# Altium PCB PCB_DYBoard_Feeder_V2.PcbDoc
Units mm, origin at the board's own origin, x right, y up, seen from the top; angles counter-clockwise.
Board outline 152.4 x 101.6 mm, 4 copper layers (Top Layer, Layer 1, Layer 2, Bottom Layer), stack 0.603 mm thick; 53 components, 31 nets, 160 pads, 54 vias.
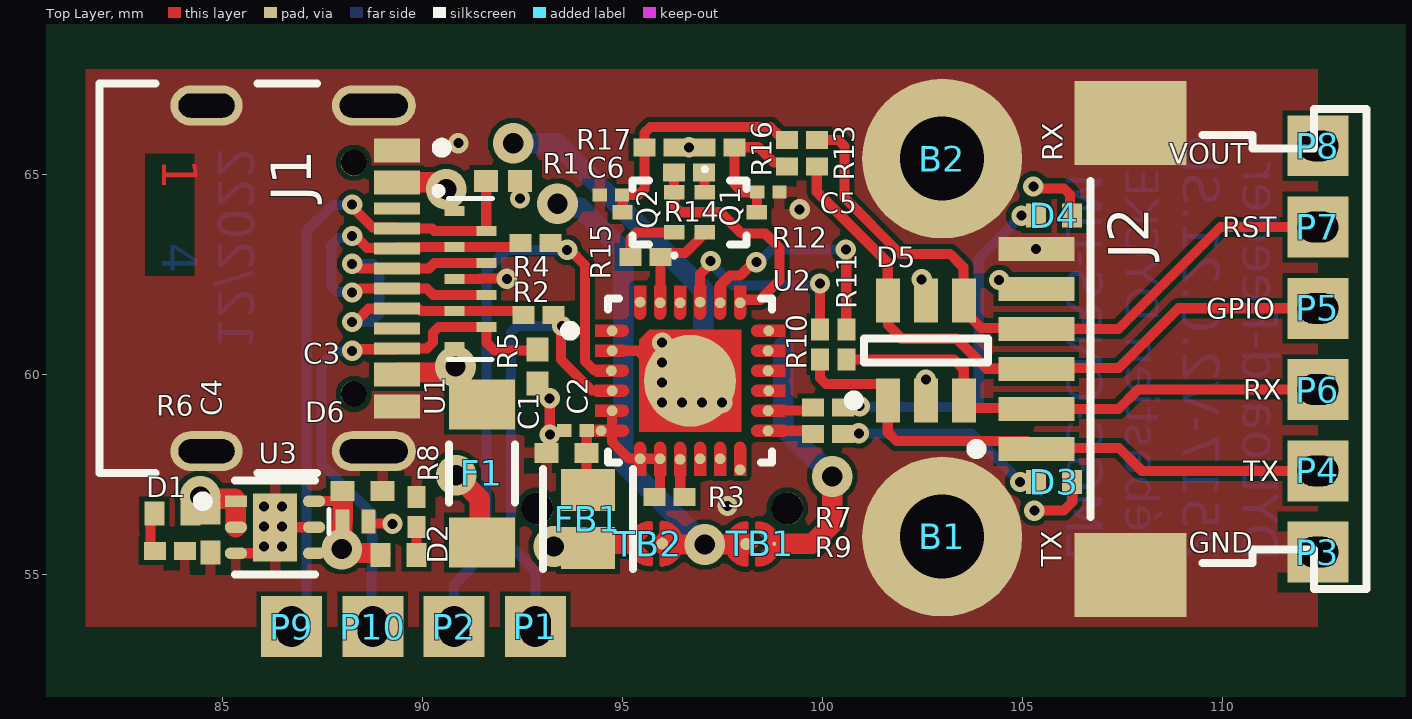
[diagram p0: Top Layer view]
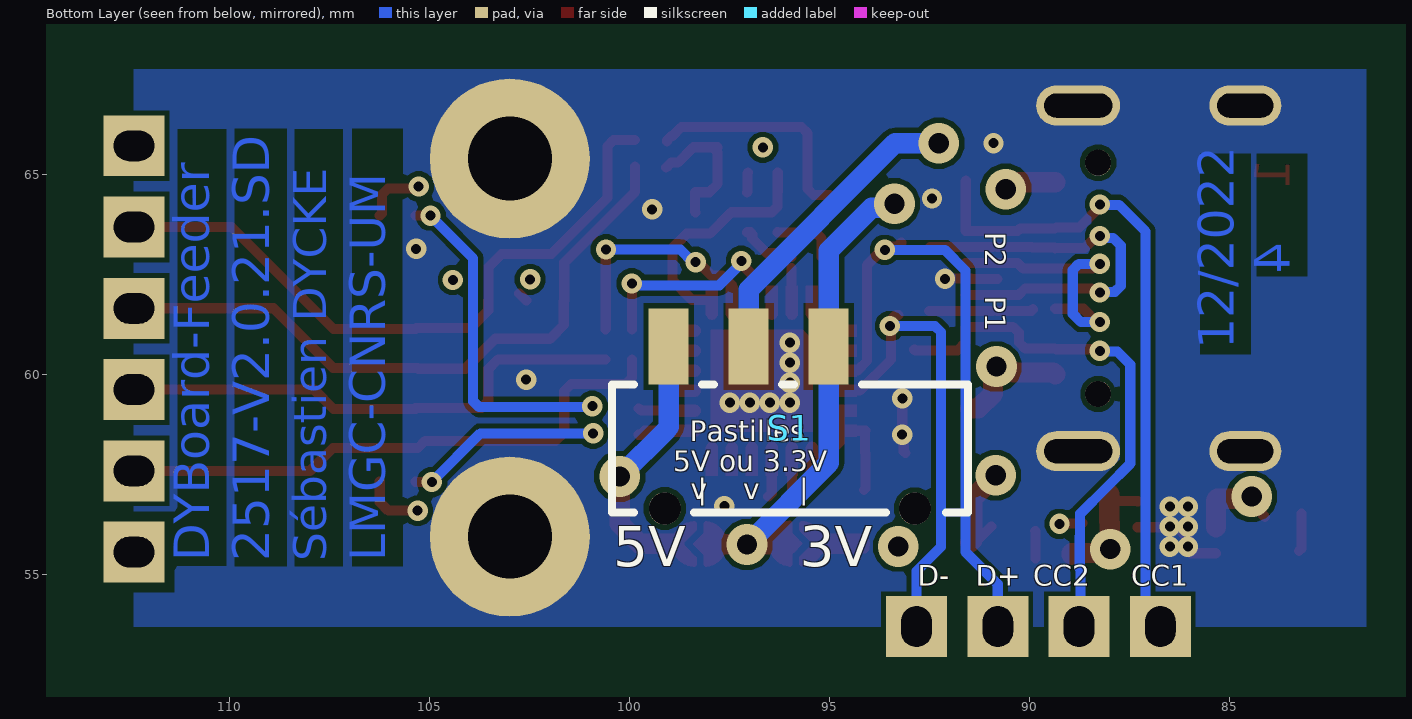
[diagram p1: Bottom Layer view, seen from below]
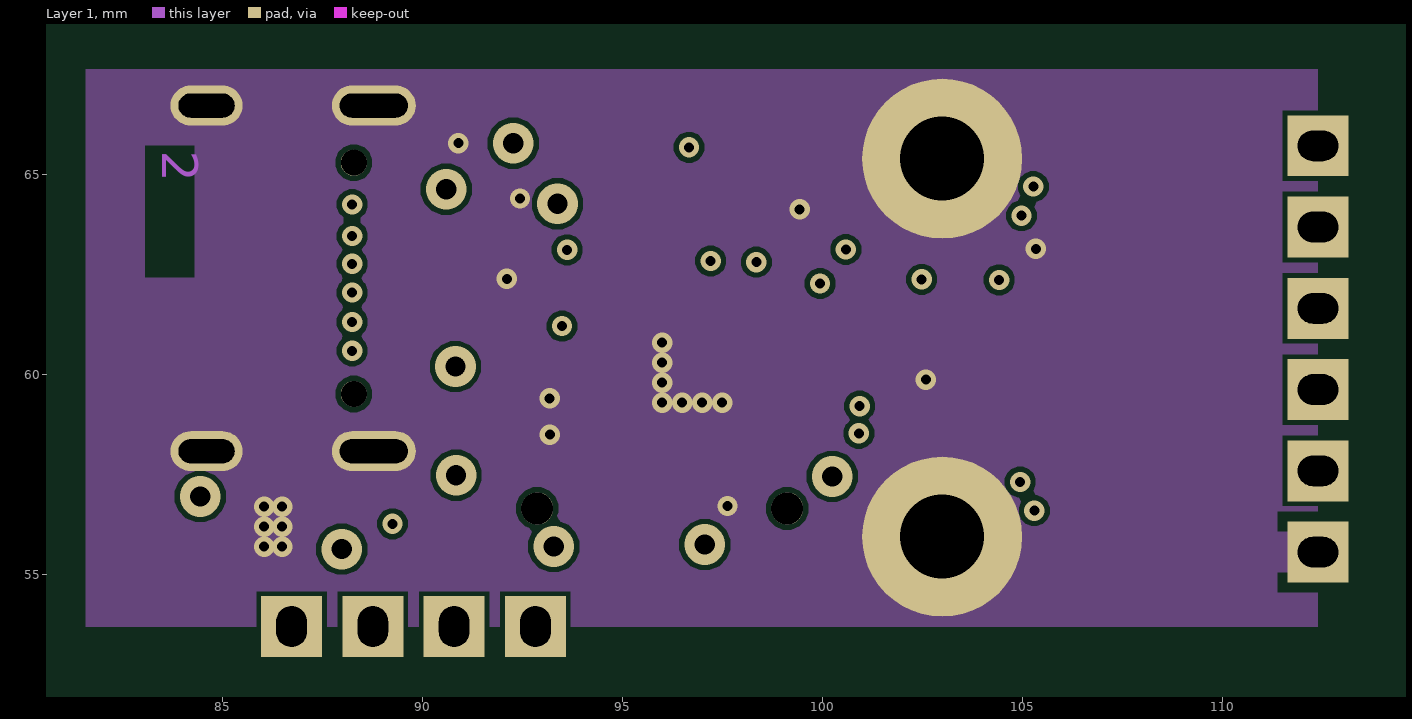
[diagram p2: Layer 1]
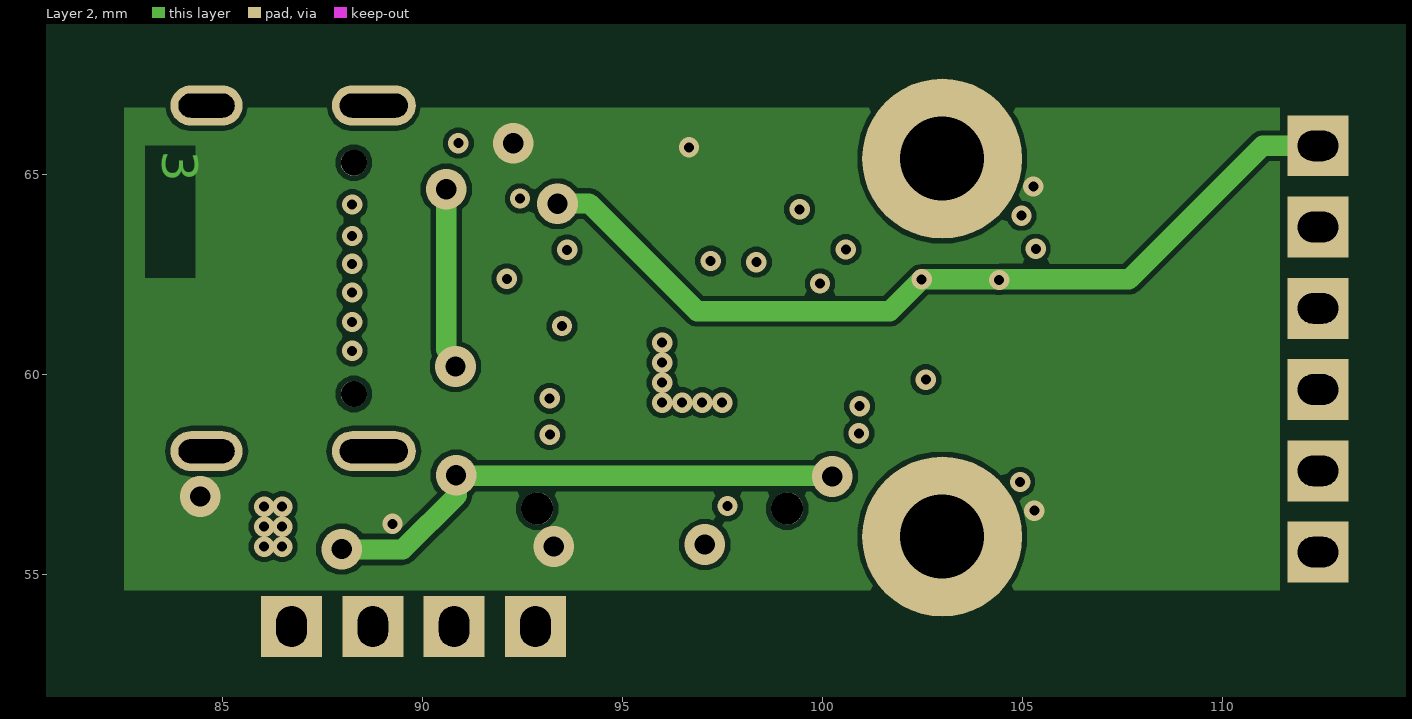
[diagram p3: Layer 2]

## Layer stack, top to bottom
Top Solder: solder mask 0.0102, Solder Resist, Dk 3.5
Top Layer: signal copper 0.0356
Dielectric 2: prepreg 0.0711, FR-4, Dk 4.1
Layer 1: signal copper 0.035
Dielectric 3: prepreg 0.0711, FR-4, Dk 4.1
Layer 2: signal copper 0.035
Dielectric 1: dielectric 0.32, FR-4, Dk 4.8
Bottom Layer: signal copper 0.0356
Bottom Solder: solder mask 0.0102, Solder Resist, Dk 3.5

## Board outline
25.4,25.4 177.8,25.4 177.8,127 25.4,127

## Design rules (kind name [scope] priority, off if disabled: settings)
Clearance [All] p1: gap=0.127 ignorepadtopadclearanceinfootprint=FALSE
ComponentClearance [All] p1: gap=0 collisioncheckmode=3 verticalgap=0 showdistances=FALSE
DiffPairsRouting [All] p1: maxlimit=0.254 minlimit=0.127 mostfreqgap=0.254 toplayer_minwidth=0.127 toplayer_maxwidth=0.254 toplayer_prefwidth=0.254 midlayer1_minwidth=0.127 midlayer1_maxwidth=0.254 midlayer1_prefwidth=0.254 midlayer2_minwidth=0.127 midlayer2_maxwidth=0.254 midlayer2_prefwidth=0.254 bottomlayer_minwidth=0.127 bottomlayer_maxwidth=0.254 bottomlayer_prefwidth=0.254 maxuncoupledlength=12.7
HoleSize [All] p1: absolutevalues=TRUE maxlimit=2.54 minlimit=0.25 maxpercent=80.000 minpercent=20.000
HoleToHoleClearance [All] p1: gap=0.127 allowstackedmicrovias=TRUE
MinimumSolderMaskSliver [All] p1: minsoldermaskwidth=0.127
PolygonConnect PolygonConnect_4 [HasFootprint('solderPad_2') And OnLayer('Layer 1')] p1: connectstyle=Direct reliefconductorwidth=0.254 reliefentries=4 polygonreliefangle="90 Angle" airgapwidth=0.254
PolygonConnect PolygonConnect_3 [HasFootprint('FP-USB4105-GF-A-MFG')] p2: connectstyle=Direct reliefconductorwidth=0.254 reliefentries=4 polygonreliefangle="90 Angle" airgapwidth=0.254
PolygonConnect PolygonConnect_2 [HasFootprint('SEB_MOLeX_6p')] p3: connectstyle=Direct reliefconductorwidth=0.254 reliefentries=4 polygonreliefangle="90 Angle" airgapwidth=0.254
PolygonConnect PolygonConnect_1 [HasFootprint('bolt_M2')] p4: connectstyle=Direct reliefconductorwidth=0.254 reliefentries=4 polygonreliefangle="90 Angle" airgapwidth=0.254
PolygonConnect [All] p5: connectstyle=Relief reliefconductorwidth=0.254 reliefentries=4 polygonreliefangle="90 Angle" airgapwidth=0.254
RoutingVias [All] p1: holewidth=0.25 width=0.809 viastyle="Through Hole" minholewidth=0.25 minwidth=0.809 maxholewidth=0.711 maxwidth=1.27
SilkToSilkClearance [All] p1: silktosilkclearance=0.127
SilkToSolderMaskClearance [IsPad] p1: minsilkscreentomaskgap=0.127 clearancetoexposedcopper=TRUE
SolderMaskExpansion [All] p1: expansion=0.102 istentingtop=FALSE
UnRoutedNet [All] p1: checkbadconnections=TRUE
Width [All] p1: maxlimit=1.016 minlimit=0.127 preferedwidth=0.254
22 further rules are at their usual default settings.

## Classes and differential pairs
component class PCB_DYBoard_Feeder_V2: B1 B2 C2 C3 C4 C5 D1 D2 D3 D4 D5 D6 F1 FB1 J1 J2 P1 P2 P3 P4 P5 P6 P7 P8 Q1 Q2 R1 R2 R3 R4 R5 R6 R7 R8 R9 R10 R11 R12 R13 R14 R15 R16 R17 S1 S? TB1 TB2 U1 U2 U3

## Components (designator, comment, footprint, x,y, rotation, side; value= is the part's Value field where it differs from the comment)
B1 "bolt_M2" bolt_M2#1 96.825,41.656 r0 top
B2 "bolt_M2" bolt_M2#2 103.759,70.561 r0 top
C1 "Cap Semi" 0402 93.608,58.043 r0 top value="100pF 0402"
C2 "0.1µF 0201" CAPC0603X33X15LL03T05 93.831,58.6 r0 top
C3 "Cap Semi" 0402 88.513,57.096 r180 top value="100pF 0402"
C4 "Cap Semi" 0402 84.709,56.056 r90 top value="100pF 0402"
C5 "0201 10nF" CAPC0603X33X15LL03T05 98.654,64.567 r180 top
C6 "0201 10nF" CAPC0603X33X15LL03T05 94.717,64.491 r0 top
D1 "LED_0402" LED_0402 84.205,56.526 r180 top
D2 "LED_0402" LED_0402 88.958,55.497 r0 top
D3 "LED_0402" LED_0402 106.25,57.321 r180 top
D4 "LED_0402" LED_0402 106.25,63.978 r180 top
D5 "SRV05-4.TCT" SMTC-SOT23-6_V 102.591,60.604 r90 top locked
D6 "ESDA17P20-1F2" ESDA17P20-1F2 88.015,56.331 r0 top
F1 "SF-1206S100-2" FP-SF-1206S-MFG 91.491,57.529 r270 top value=132mΩ
FB1 "BLM21PG121SN1D" FP-BLM21-0_2-t0_85-e0_5-d-IPC_C 94.144,56.39 r90 top locked
J1 "USB4105-GF-A" FP-USB4105-GF-A-MFG 85.776,62.408 r270 top locked
J2 "SEB_MOLeX_6p" SEB_MOLeX_6p 110.088,60.514 r90 top locked
P1 "solderPad" solderPad_2#1 92.837,61.62 r90 top locked
P2 "solderPad" solderPad_2#2 92.837,63.144 r90 top locked
P3 "solderPad" solderPad_2#3 101.042,60.706 r0 top locked
P4 "solderPad" solderPad_2#4 109.779,58.166 r90 top locked
P5 "solderPad" solderPad_2#5 109.779,61.468 r90 top locked
P6 "solderPad" solderPad_2#6 109.779,59.817 r90 top locked
P7 "solderPad" solderPad_2#7 109.779,63.119 r90 top locked
P8 "solderPad" solderPad_2#8 114.47,66.159 r0 top
P9 "solderPad" solderPad_2#9 179.934,27.788 r0 top
P10 "solderPad" solderPad_2#10 184.264,27.788 r90 top
Q1 "MMBT2222ATT3G" ONSC-SC-75-3-463-01_V 97.714,64.059 r0 top
Q2 "MMBT2222ATT3G" ONSC-SC-75-3-463-01_V 95.656,64.059 r180 top
R1 "5.1K 0402" RESC1005X40X25NL05T10 92.024,64.846 r0 top
R2 "47R 0201" RESC0603X26X15ML03T05 92.913,61.493 r0 top
R3 "1K 0201" RESC0603X26X15ML03T05 96.19,56.947 r0 top
R4 "47R 0201" RESC0603X26X15ML03T05 92.837,63.297 r0 top
R5 "5.1K 0402" RESC1005X40X25NL05T10 92.888,60.198 r270 top
R6 "330R 0201" RESC0603X26X15ML03T05 83.694,55.594 r0 top
R7 "330R 0201" RESC0603X26X15ML03T05 100.152,59.182 r180 top
R8 "330R 0201" RESC0603X26X15ML03T05 89.865,56.564 r90 top
R9 "330R 0201" RESC0603X26X15ML03T05 100.152,58.522 r180 top
R10 "47R 0201" RESC0603X26X15ML03T05 99.949,60.757 r270 top
R11 "47R 0201" RESC0603X26X15ML03T05 100.609,60.757 r270 top
R12 "47R 0201" RESC0603X26X15ML03T05 99.492,65.202 r0 top
R13 "47R 0201" RESC0603X26X15ML03T05 99.492,65.862 r0 top
R14 "10K 0201" RESC0603X26X15ML03T05 96.672,65.049 r180 top
R15 "10K 0201" RESC0603X26X15ML03T05 95.58,62.941 r0 top
R16 "10K 0201" RESC0603X26X15ML03T05 97.434,65.684 r180 top
R17 "10K 0201" RESC0603X26X15ML03T05 95.936,65.684 r0 top
S1 "450405020524" 450405020524 96,56.653 r180 bottom locked
TB1 "tin_bridge" tin_bridge#1 97.5,55.77 r270 top
TB2 "tin_bridge" tin_bridge#2 96.6,55.77 r90 top
U1 "AQ7538-08UTG" PCBComponent_1 90.805,62.395 r0 top locked
U2 "CP2102N-A02-GQFN24R" FP-CP2102N-A02-GQFN24R-MFG 96.698,59.847 r0 top locked
U3 "TLV76733DRVR" FP-DRV0006A-IPC_C 86.322,56.185 r0 top locked

## Footprints (in the part's own frame and the unit in brackets; to place one, negate y for a bottom-side part, rotate by r counter-clockwise, add the part's x,y. Pads: shape width x height; smd on the part's side, far side on the other; paste and mask are expansions set on the pad)
0402 [mm] "Chip Capacitor, Body 1.0x0.5mm, IPC High Density"
  rect 0.6x0.5 smd: 1(-0.5,0) 2(0.5,0)
  body extent -0.55,-0.3 0.55,0.3, height 1.3
450405020524 [mm]
  rect 1x1.9 smd: 1(-3.03,4.05) 2(-1.03,4.05) 3(0.97,4.05)
  round 0.8 hole 0.8 unplated: ""(-3.125,0) ""(3.125,0)
  silkscreen extent -4.45,-0.1 4.45,3.1
bolt_M2#1 [mm]
  round 4 hole 2.1: 20(6.175,14.294)
bolt_M2#2 [mm]
  round 4 hole 2.1: 20(-0.759,-5.161)
CAPC0603X33X15LL03T05 [mm] "Chip Capacitor, 2-Leads, Body 0.60x0.30mm, IPC High Density"
  rect 0.36x0.32 smd: 1(-0.28,0) 2(0.28,0)
  body extent -0.32,-0.17 0.32,0.17, height 0.33
ESDA17P20-1F2 [mm]
  rect 0.35x0.6 smd: 18(0.65,0) 19(0,0)
  silkscreen extent -0.34,-0.3 -0.34,0.3, body extent -0.18,-0.3 0.82,0.3, height 0.35
FP-BLM21-0_2-t0_85-e0_5-d-IPC_C [mm]
  rect 1.055x1.356 smd paste+0 mask+0: 1(-0.726,0) 2(0.726,0)
  silkscreen extent -1.25,-1.12 1.25,1.12, body extent -1.35,-0.82 1.35,0.82, height 0.25
FP-CP2102N-A02-GQFN24R-MFG [mm]
  round 0.27 smd paste+0 mask+0: 1(-1.95,1.25) 2(-1.95,0.75) 3(-1.965,0.25) 4(-1.95,-0.25) 5(-1.95,-0.75) 6(-2.225,-1.25) 7(-1.25,-1.95) 8(-0.75,-1.95) 9(-0.25,-1.965) 10(0.25,-1.95) 11(0.75,-1.95) 12(1.25,-2.225) 13(1.95,-1.25) 14(1.95,-0.75) 15(1.965,-0.25) 16(1.95,0.25) 17(1.95,0.75) 18(1.965,1.25) 19(1.25,1.95) 20(0.75,1.95) 21(0.25,1.965) 22(-0.25,1.95) 23(-0.75,1.95) 24(-1.25,1.965)
  round 2.295 smd paste-1000 mask+0: 25(0,0)
  Top Layer region: -1.1,2.375 -1.1,1.675 -1.111,1.618 -1.144,1.569 -1.193,1.536 -1.25,1.525 -1.25,1.525 -1.307,1.536 -1.356,1.569 -1.389,1.618 -1.4,1.675 -1.4,1.675 -1.4,2.375
  Top Layer region: -0.6,2.375 -0.6,1.675 -0.611,1.618 -0.644,1.569 -0.693,1.536 -0.75,1.525 -0.75,1.525 -0.807,1.536 -0.856,1.569 -0.889,1.618 -0.9,1.675 -0.9,1.675 -0.9,2.375
  Top Layer region: -0.1,2.375 -0.1,1.675 -0.111,1.618 -0.144,1.569 -0.193,1.536 -0.25,1.525 -0.25,1.525 -0.307,1.536 -0.356,1.569 -0.389,1.618 -0.4,1.675 -0.4,1.675 -0.4,2.375
  Top Layer region: 0.4,2.375 0.4,1.675 0.389,1.618 0.356,1.569 0.307,1.536 0.25,1.525 0.25,1.525 0.193,1.536 0.144,1.569 0.111,1.618 0.1,1.675 0.1,1.675 0.1,2.375
  Top Layer region: 0.9,2.375 0.9,1.675 0.889,1.618 0.856,1.569 0.807,1.536 0.75,1.525 0.75,1.525 0.693,1.536 0.644,1.569 0.611,1.618 0.6,1.675 0.6,1.675 0.6,2.375
  Top Layer region: 1.4,2.375 1.4,1.675 1.389,1.618 1.356,1.569 1.307,1.536 1.25,1.525 1.25,1.525 1.193,1.536 1.144,1.569 1.111,1.618 1.1,1.675 1.1,1.675 1.1,2.375
  Top Layer region: 1.1,-2.375 1.1,-1.675 1.111,-1.618 1.144,-1.569 1.193,-1.536 1.25,-1.525 1.25,-1.525 1.307,-1.536 1.356,-1.569 1.389,-1.618 1.4,-1.675 1.4,-1.675 1.4,-2.375
  Top Layer region: 0.6,-2.375 0.6,-1.675 0.611,-1.618 0.644,-1.569 0.693,-1.536 0.75,-1.525 0.75,-1.525 0.807,-1.536 0.856,-1.569 0.889,-1.618 0.9,-1.675 0.9,-1.675 0.9,-2.375
  Top Layer region: 0.1,-2.375 0.1,-1.675 0.111,-1.618 0.144,-1.569 0.193,-1.536 0.25,-1.525 0.25,-1.525 0.307,-1.536 0.356,-1.569 0.389,-1.618 0.4,-1.675 0.4,-1.675 0.4,-2.375
  Top Layer region: -0.4,-2.375 -0.4,-1.675 -0.389,-1.618 -0.356,-1.569 -0.307,-1.536 -0.25,-1.525 -0.25,-1.525 -0.193,-1.536 -0.144,-1.569 -0.111,-1.618 -0.1,-1.675 -0.1,-1.675 -0.1,-2.375
  Top Layer region: -0.9,-2.375 -0.9,-1.675 -0.889,-1.618 -0.856,-1.569 -0.807,-1.536 -0.75,-1.525 -0.75,-1.525 -0.693,-1.536 -0.644,-1.569 -0.611,-1.618 -0.6,-1.675 -0.6,-1.675 -0.6,-2.375
  Top Layer region: -1.4,-2.375 -1.4,-1.675 -1.389,-1.618 -1.356,-1.569 -1.307,-1.536 -1.25,-1.525 -1.25,-1.525 -1.193,-1.536 -1.144,-1.569 -1.111,-1.618 -1.1,-1.675 -1.1,-1.675 -1.1,-2.375
  Top Layer region: 2.375,1.1 1.675,1.1 1.618,1.111 1.569,1.144 1.536,1.193 1.525,1.25 1.525,1.25 1.536,1.307 1.569,1.356 1.618,1.389 1.675,1.4 1.675,1.4 2.375,1.4
  Top Layer region: 2.375,0.6 1.675,0.6 1.618,0.611 1.569,0.644 1.536,0.693 1.525,0.75 1.525,0.75 1.536,0.807 1.569,0.856 1.618,0.889 1.675,0.9 1.675,0.9 2.375,0.9
  Top Layer region: 2.375,0.1 1.675,0.1 1.618,0.111 1.569,0.144 1.536,0.193 1.525,0.25 1.525,0.25 1.536,0.307 1.569,0.356 1.618,0.389 1.675,0.4 1.675,0.4 2.375,0.4
  Top Layer region: 2.375,-0.4 1.675,-0.4 1.618,-0.389 1.569,-0.356 1.536,-0.307 1.525,-0.25 1.525,-0.25 1.536,-0.193 1.569,-0.144 1.618,-0.111 1.675,-0.1 1.675,-0.1 2.375,-0.1
  Top Layer region: 2.375,-0.9 1.675,-0.9 1.618,-0.889 1.569,-0.856 1.536,-0.807 1.525,-0.75 1.525,-0.75 1.536,-0.693 1.569,-0.644 1.618,-0.611 1.675,-0.6 1.675,-0.6 2.375,-0.6
  Top Layer region: 2.375,-1.4 1.675,-1.4 1.618,-1.389 1.569,-1.356 1.536,-1.307 1.525,-1.25 1.525,-1.25 1.536,-1.193 1.569,-1.144 1.618,-1.111 1.675,-1.1 1.675,-1.1 2.375,-1.1
  Top Layer region: -2.375,-1.1 -1.675,-1.1 -1.618,-1.111 -1.569,-1.144 -1.536,-1.193 -1.525,-1.25 -1.525,-1.25 -1.536,-1.307 -1.569,-1.356 -1.618,-1.389 -1.675,-1.4 -1.675,-1.4 -2.375,-1.4
  Top Layer region: -2.375,-0.6 -1.675,-0.6 -1.618,-0.611 -1.569,-0.644 -1.536,-0.693 -1.525,-0.75 -1.525,-0.75 -1.536,-0.807 -1.569,-0.856 -1.618,-0.889 -1.675,-0.9 -1.675,-0.9 -2.375,-0.9
  Top Layer region: -2.375,-0.1 -1.675,-0.1 -1.618,-0.111 -1.569,-0.144 -1.536,-0.193 -1.525,-0.25 -1.525,-0.25 -1.536,-0.307 -1.569,-0.356 -1.618,-0.389 -1.675,-0.4 -1.675,-0.4 -2.375,-0.4
  Top Layer region: -2.375,0.4 -1.675,0.4 -1.618,0.389 -1.569,0.356 -1.536,0.307 -1.525,0.25 -1.525,0.25 -1.536,0.193 -1.569,0.144 -1.618,0.111 -1.675,0.1 -1.675,0.1 -2.375,0.1
  Top Layer region: -2.375,0.9 -1.675,0.9 -1.618,0.889 -1.569,0.856 -1.536,0.807 -1.525,0.75 -1.525,0.75 -1.536,0.693 -1.569,0.644 -1.618,0.611 -1.675,0.6 -1.675,0.6 -2.375,0.6
  Top Layer region: -2.375,1.4 -1.675,1.4 -1.618,1.389 -1.569,1.356 -1.536,1.307 -1.525,1.25 -1.525,1.25 -1.536,1.193 -1.569,1.144 -1.618,1.111 -1.675,1.1 -1.675,1.1 -2.375,1.1
  Top Layer region: -1.275,1.025 -1.025,1.275 1.275,1.275 1.275,-1.275 -1.275,-1.275 -1.275,1.025
  silkscreen extent -3.12,-2.05 2.05,2.05, body extent -2.48,-2.48 2.48,2.48, height 0.25
FP-DRV0006A-IPC_C [mm]
  rect 0.556x0.292 smd paste+0 mask+0: 1(-0.978,0.65)
  rrect100% 0.556x0.292 smd paste+0 mask+0: 2(-0.978,0) 3(-0.978,-0.65) 4(0.978,-0.65) 5(0.978,0) 6(0.978,0.65)
  rect 1.1x1.7 smd paste-1000 mask+0: 7(0,0)
  silkscreen extent -1.93,-1.17 1,1.17, body extent -1.36,-1.1 1.36,1.1, height 0.25
FP-SF-1206S-MFG [mm]
  rect 1.25x1.65 smd paste+0 mask+0: 1(-1.725,0) 2(1.725,0)
  silkscreen extent -0.72,-0.82 0.72,0.82, body extent -1.7,-0.77 1.4,0.77, height 0.7
FP-USB4105-GF-A-MFG [mm]
  rrect100% 1x2.1 hole 1.7 slot 0.6 at 0 deg paste-1000 mask+0: 1(-4.32,3.015) 2(4.32,3.015)
  rrect100% 1x1.8 hole 1.4 slot 0.6 at 0 deg paste-1000 mask+0: 3(-4.32,-1.165) 4(4.32,-1.165)
  rect 0.6x1.15 smd paste+0 mask+0: A1-B12(-3.2,3.59) A4-B9(-2.4,3.59) B1-A12(3.2,3.59) B4-A9(2.4,3.59)
  rect 0.3x1.15 smd paste+0 mask+0: A5(-1.25,3.59) A6(-0.25,3.59) A7(0.25,3.59) A8(1.25,3.59) B5(1.75,3.59) B6(0.75,3.59) B7(-0.75,3.59) B8(-1.75,3.59)
  round 0.65 hole 0.65 unplated paste-1000 mask+0: ""(-2.89,2.515) ""(2.89,2.515)
  silkscreen extent -4.86,-3.84 4.86,4.84, body extent -4.96,-3.94 4.96,4.27, height 0.25
LED_0402 [mm]
  rect 0.5x0.6 smd: 23(0,0) 24(0.9,0)
  body extent 0,-0.25 0.89,0.25, height 0.26
ONSC-SC-75-3-463-01_V [mil] "SOT23, 3-Leads, Body 1.6x0.8mm, Pitch 0.5mm"
  rect 20x14.02 smd: 1(-25.49,19.68) 2(-25.49,-19.69) 3(25.49,0)
  silkscreen extent -27,-31 16,44, body extent -16,-31 16,31, height 35
PCBComponent_1 [mm]
  rect 0.5x0.25 smd: 1(0,1.7) 2(0,0.8) 3(0,0) 4(0,-0.8) 5(0,-1.7) 6(0.8,-1.2) 7(0.8,-0.4) 8(0.8,0.4) 9(0.8,1.2)
  silkscreen extent -0.45,-2.01 0.95,2.25, body extent -0.15,-1.95 0.95,1.95, height 0.25
RESC0603X26X15ML03T05 [mm] "Chip Resistor, 2-Leads, Body 0.60x0.30mm, IPC Low Density"
  rect 0.55x0.45 smd: 1(-0.375,0) 2(0.375,0)
  body extent -0.32,-0.16 0.32,0.17, height 0.26
RESC1005X40X25NL05T10 [mm] "Chip Resistor, 2-Leads, Body 1.00x0.50mm, IPC Medium Density"
  rect 0.6x0.55 smd: 1(-0.425,0) 2(0.425,0)
  body extent -0.53,-0.27 0.53,0.28, height 0.4
SEB_MOLeX_6p [mm] "52207-0633"
  rect 0.6x1.9 smd: 1(-2.373,4.731) 2(-1.373,4.731) 3(-0.373,4.731) 4(0.627,4.731) 5(1.627,4.731) 6(2.627,4.731)
  rect 2.1x2.8 smd: MP1(-5.523,2.381) MP2(5.777,2.381)
  silkscreen extent -5.87,-3.52 6.13,6.36, body extent -6.02,-3.46 6.28,5.44, height 2.71
SMTC-SOT23-6_V [mm] "SOT23, 6-Leads, Body 3.15x1.7mm, Pitch 0.95mm"
  rect 1.1x0.6 smd: 1(-1.25,0.95) 2(-1.25,0) 3(-1.25,-0.95) 4(1.25,-0.95) 5(1.25,0) 6(1.25,0.95)
  silkscreen extent -1.37,-1.55 0.3,1.92, body extent -0.87,-1.55 0.87,1.55, height 1.45
solderPad_2#1 [mil]
  rect 60x60 hole 30 slot 40 at 0 deg: 20(-311.83,0.2)
solderPad_2#2 [mil]
  rect 60x60 hole 30 slot 40 at 0 deg: 20(-371.83,80.2)
solderPad_2#3 [mil]
  rect 60x60 hole 30 slot 40 at 0 deg mask+4.72: 20(446.97,-202.48)
solderPad_2#4 [mil]
  rect 60x60 hole 30 slot 40 at 90 deg: 20(-22.48,-103)
solderPad_2#5 [mil]
  rect 60x60 hole 30 slot 40 at 90 deg: 20(7.5,-103)
solderPad_2#6 [mil]
  rect 60x60 hole 30 slot 40 at 90 deg: 20(-7.5,-103)
solderPad_2#7 [mil]
  rect 60x60 hole 30 slot 40 at 90 deg: 20(22.48,-103)
solderPad_2#8 [mil]
  rect 60x60 hole 30 slot 40 at 0 deg: 20(-81.69,-17.2)
solderPad_2#9 [mil]
  rect 60x60 hole 30 slot 40 at 90 deg: 20(-3669.2,1020.17)
solderPad_2#10 [mil]
  rect 60x60 hole 30 slot 40 at 0 deg: 20(1020.17,3759.67)
tin_bridge#1 [mm]
  round 0.1 smd mask+0: 21(0,1.303)
  round 0.3 smd mask+0: 22(0.005,0.598)
  Top Layer region: -0.508,0.889 -0.354,0.889 -0.051,1.192 0.056,1.192 0.359,0.889 0.513,0.889 0.508,0.894 0.381,1.143 0.254,1.397 -0.254,1.397 -0.381,1.143
  Top Layer region: -0.509,0.598 -0.503,0.598 -0.249,0.127 0.254,0.127 0.519,0.598 0.259,0.598 0.005,0.852 -0.249,0.598 -0.503,0.598
  Top Layer lines w0.127: 0.519,0.598 cw(c0.005,0.643) 0.353,0.262 cw(c0.005,0.643) 0.012,0.127 cw(c0.005,0.643) -0.337,0.256 cw(c0.005,0.643) -0.509,0.598 ; 0.513,0.598 0.259,0.598 0.132,0.725 0.005,0.852 -0.122,0.725 -0.249,0.598 -0.503,0.598 ; 0.513,0.889 ccw(c0.005,0.889) 0.305,1.299 ccw(c0.005,0.889) 0.246,1.336 ccw(c0.005,0.889) 0.087,1.39 ccw(c0.005,0.889) 0,1.397 ccw(c0.005,0.889) -0.086,1.389 ccw(c0.005,0.889) -0.503,0.889 -0.354,0.889 -0.051,1.192 0,1.192 0.056,1.192 0.116,1.132 0.359,0.889 0.513,0.889
tin_bridge#2 [mm]
  round 0.1 smd mask+0: 21(0,1.303)
  round 0.3 smd mask+0: 22(0.005,0.598)
  Top Layer region: -0.508,0.889 -0.354,0.889 -0.051,1.192 0.056,1.192 0.359,0.889 0.513,0.889 0.508,0.894 0.381,1.143 0.254,1.397 -0.254,1.397 -0.381,1.143
  Top Layer region: -0.509,0.598 -0.503,0.598 -0.249,0.127 0.254,0.127 0.519,0.598 0.259,0.598 0.005,0.852 -0.249,0.598 -0.503,0.598
  Top Layer lines w0.127: -0.509,0.598 ccw(c0.005,0.643) -0.334,0.254 ccw(c0.005,0.643) -0.319,0.241 ccw(c0.005,0.643) -0.294,0.222 ccw(c0.005,0.643) -0.018,0.127 ccw(c0.005,0.643) 0.344,0.254 ccw(c0.005,0.643) 0.519,0.598 ; -0.503,0.598 -0.249,0.598 -0.139,0.708 -0.122,0.725 0.005,0.852 0.132,0.725 0.149,0.708 0.259,0.598 0.513,0.598 ; 0,1.397 ccw(c0.005,0.889) -0.503,0.889 -0.354,0.889 -0.051,1.192 -0.009,1.192 0,1.192 0.056,1.192 0.359,0.889 0.513,0.889 ccw(c0.005,0.889) 0.168,1.37 ccw(c0.005,0.889) 0.087,1.39 ccw(c0.005,0.889) 0,1.397

## Part data
C1 C3 C4: "Capacitor (Semiconductor SIM Model)", LatestRevisionDate=29-May-2009, LatestRevisionNote="IPC-7351 Footprint Added.", PackageDescription="Chip Capacitor", PackageReference=C1206, Published=8-Jun-2000, Publisher="Altium Limited"
C2 C5 C6: library part CMP-2010-00159-1, Manufacturer="AVX Interconnect / Elco", Part Number=02016D104KAT2A
D5: library part CMP-2000-05358-1, "RailClamp(R) Low Capacitance TVS Diode Array, 5 pF, 17.5 VC, -55 to 125 degC, 6-Pin SOT23, RoHS, Tape and Reel", Capacitance Value=5pF, Clamping Voltage=17.5V, Clamping Voltage (Max)=12.5V, Leakage Current=5uA, Manufacturer=Semtech, Operating Temp Range=-55Cto125C, Operating Temperature Classification=Military, Operating Temperature Max Deg. C=125C, Operating Temperature Min Deg. C=-55C, Package / Case=SOT-23, Package Description="6-Pin Small Outline Transistor, Body 2.9 x 1.6 mm, Pitch 0.95 mm", Package Reference=SOT23-6, Peak Pulse Current=12A, Peak Pulse Power Dissipation=300W, Reverse Breakdown Voltage=6V, Reverse Stand-off Voltage=5V, Test Current (It)=1mA, Configuration=Quad, Datasheet URL=https://datasheet.ciiva.com/8029/srv05-4-8029973.pdf, Datasheet Version=Jan-08, Direction Type=Uni-Directional, Leakage Current (Max)=5uA, Manufacturer URL=http://www.semtech.com/, Mounting=SurfaceMount, Mounting Style=SurfaceMount, Number of Elements=1, Packaging=TapeandReel, Pin Count=6, Polarity=Uni-Directional, Product Depth (mm)=1.6mm, Product Height (mm)=1.15mm, Product Length (mm)=2.9mm, Rad Hardened=No, Suppressor Type=DiodeArrays, Working Voltage=5V, Working Voltage (Max)=5V
F1: library part CMP-07399-000003-1, "FUSE BOARD MOUNT 1A 63VDC 1206", Fuse Current=1A, Fuse Interrupt Dc Current=50A, Manufacturer="Bourns Inc.", Max Fuse Dc Voltage=63V, Package=SF-1206S, Resistance=132mΩ, Temperature="-20°C to +105°C", Temperature Range High=+105°C, Temperature Range Low=-20°C, Automotive=No, Category=Fuse, ComponentLink2Description=Datasheet, ComponentLink2URL=https://www.bourns.com/docs/Product-Datasheets/sf1206s.pdf, Device Class L1="Circuit Protection", Device Class L2=Fuses, Device Class L3=unset, Digikey Description="FUSE BOARD MOUNT 1A 63VDC 1206", Fuse Blow Speed=Slow, Fuse I2T=0.098A2Sec, Height=0.7mm, Lead Free=Yes, Manufacturer Part Number=SF-1206S100-2, Mouser Description="Surface Mount Fuses 1A Slow Blow SinglFuse", Octopart=https://octopart.com/sf-1206s100-2-bourns-8398337, RoHS=TRUE, Voltage Rating=63V
FB1: library part CMP-0686-00612-3, "Chip Ferrite Bead, 0805, 120Ω @ 100MHz, 0.03Ω, 25%, 3A", Case Code (Imperial)=0805, Case Code (Metric)=2012, Current Rating=3A, DC Resistance (DCR)=30mR, Max Operating Temperature=125°C, Min Operating Temperature=-55°C, Package Quantity=1, Test Frequency=100MHz, Tolerance=25%, Case/Package=0805, DC Resistance-Max=30mR, Depth=1.25mm, Height=0.85mm, Impedance=120R, Lead Free="Lead Free", Length=2mm, Material=Steel, Max Current Rating=3A, Max DC Current=3A, Number of Circuits=1, Number of Lines=1, Number of Pins=2, Packaging="Tape and Reel", REACH SVHC="No SVHC", RoHS Compliant=Yes, Series=BLM21P, Termination=SMD/SMT, Width=1.25mm
J1: library part CMP-245163-000001-1, "CONN RCPT USB2.0 TYPEC 5A", Current Rating=5/6.25/1.25/0.25A, Manufacturer=GCT, Package=0, Temperature="-40°C to +85°C", Temperature Range High=+85°C, Temperature Range Low=-40°C, Voltage Rating=20V, Automotive=No, Category=Conn, ComponentLink2Description=Datasheet, ComponentLink2URL=https://gct.co/files/drawings/usb4105.pdf, Conn Orientation="Right Angle", Contact Material=Gold,Nickel, Device Class L1=Connectors, Device Class L2="USB Connectors", Device Class L3=unset, Digikey Description="CONN RCPT USB2.0 TYPEC 5A", Height=3.46mm, Is Female=yes, Lead Free=Yes, Manufacturer Part Number=USB4105-GF-A, Number Of Contacts=16, Octopart=https://octopart.com/usb4105-gf-a-gct-106627878, RoHS=TRUE, Usb Standard="USB 2.0"
Q1 Q2: library part CMP-1048-00416-1, "General Purpose Transistor, NPN Silicon, 3-Pin SC-75, Pb-Free, Tape and Reel", Manufacturer="On Semiconductor", ComponentLink1Description="Manufacturer URL", ComponentLink1URL=http://www.onsemi.com/, ComponentLink2Description=Datasheet, ComponentLink2URL=http://www.onsemi.cn/pub_link/Collateral/MMBT2222ATT1-D.PDF, ComponentLink3Description="Package Specification", ComponentLink3URL=http://www.onsemi.com/pub_link/Collateral/463-01.PDF, DatasheetVersion="Rev. 5", fT Min (MHz)=300, IC Continuous (A)=0.6, Mounting Technology="Surface Mount", PackageDescription="3-Pin Small Outline Transistor, Body 1.6 x 0.8 mm, Pitch 0.5 mm", PackageReference=SC-75-3-463-01, PackageVersion="Rev. F, 07/2005", Packing="Tape and Reel", PartNumber=MMBT2222ATT3G, Polarity=NPN, RoHS=TRUE
R1 R5: library part CMP-2002-07472-1, Manufacturer="Yageo / Phycomp", Part Number=RC0402FR-071KL
R2 R3 R4 R6 R7 R8 R9 R10 R11 R12 R13 R14 R15 R16 R17: library part CMP-2004-03517-1, Manufacturer=Panasonic, Part Number=ERJ1GNF47R0C
S1: "SMT 8.7 X 3.0 MM MINI SLIDE SWIT", Package=None, Availability=Warning, Check_prices=https://www.snapeda.com/parts/450405020524/Wurth%20Electronics%20Inc./view-part/4900805/?ref=eda, MF="WÃ¼rth Elektronik", MP=450405020524, Price=None, Purchase-URL=https://pricing.snapeda.com/search/part/450405020524/?ref=eda, SnapEDA_Link=https://www.snapeda.com/parts/450405020524/Wurth%20Electronics%20Inc./view-part/4900805/?ref=snap
U2: library part CMP-08107-000009-1, "IC USB TO UART BRIDGE QFN24"
U3: library part CMP-04917-000203-1, "VOLTAGE COMPARATOR"

## Via types
v1: diameter 0.508, hole 0.25, Top Layer to Bottom Layer, 44 vias
v2: diameter 1.016, hole 0.508, Top Layer to Bottom Layer, 10 vias

## Nets (pads, with @x,y where several pads share a name; then routed paths per layer and width w, separated by ;. In a path a pad name is that pad's centre, name@x,y a point inside that pad or via, vN(x,y) a via of type N, cw(c..) or ccw(c..) an arc to the next point about the centre after c; other vN are vias at no path point)
3.3V: C4.2 D1.23 D3.23 D4.23 D6.18 FB1.1 R16.2 R17.2 S1.2 TB2.21 U3.1 U3.2 | length 14.7
  Top Layer w0.254: D1.23@84.118,56.439 D1.23 84.205,56.705 84.453,56.953 v2(84.455,56.953) ; U3.1@85.324,56.854 U3.1 ; D6.18@88.686,56.289 88.697,56.278 89.253,56.278 v1(89.259,56.272) ; FB1.1@94.134,55.655 FB1.1@94.25,55.77 ; v1(105.279,64.702) 105.328,64.653 106.047,64.653 106.195,64.504 106.195,64.033 D4.23 ; v1(105.304,56.601) 106.035,56.601 106.251,56.817 D3.23 D3.23
  Top Layer w0.508: v2(84.455,56.953) 84.514,56.894 85.32,56.894 85.324,56.889 U3.1@85.324,56.854 ; U3.2 U3.1 ; FB1.1@94.25,55.77 95.203,55.77
  Bottom Layer w0.508: v2(92.278,65.786) 93.37,65.786 97.03,62.126 S1.2
  other v1: 96.672,65.684
  other v2: 93.289,55.704
CC1: J1.A5 P9.20 R1.1 U1.9 | length 16.4
  Top Layer w0.254: v1@88.3,64.256 88.3,64.14 88.759,63.681 89.343,63.681 J1.A5 90.241,63.658 90.303,63.595 U1.9 91.602,63.597 91.602,64.843 R1.1
  Bottom Layer w0.254: P9.20 87.106,54.07 87.106,63.581 87.77,64.245 88.239,64.245 v1(88.25,64.256)
CC2: J1.B5 P10.20 R5.1 U1.6 | length 13.5
  Top Layer w0.254: v1@88.29,60.596 88.328,60.635 89.343,60.635 J1.B5 89.367,60.657 90.123,60.657 90.272,60.805 90.272,61.046 90.42,61.195 U1.6 91.605,60.809 91.809,60.604 92.869,60.604 R5.1
  Bottom Layer w0.254: v1(88.25,60.596) 88.231,60.577 87.81,60.577 87.487,60.254 87.487,57.775 88.082,57.18 88.742,56.52 88.742,55.965 88.752,55.955 88.752,55.156 88.73,55.134 88.73,53.738 P10.20
D+: P2.20 R4.2 U2.3 | length 15.7
  Top Layer w0.254: R4.2 93.31,63.199 93.476,63.199 93.556,63.119 93.692,63.119 94.072,62.738 94.072,61.571 94.069,61.568 94.069,60.342 94.311,60.1 94.729,60.1 U2.3
  Bottom Layer w0.254: P2.20 90.8,54.76 91.611,55.571 91.611,62.606 92.124,63.119 v1(93.624,63.119)
D-: P1.20 R2.2 U2.4 | length 11.8
  Top Layer w0.254: R2.2 93.338,61.493 93.436,61.395 93.436,61.345 93.449,61.333 93.449,61.263 v1(93.497,61.214) 93.472,61.189 93.472,60.376 94.247,59.6 94.745,59.6 U2.4
  Bottom Layer w0.254: P1.20 92.832,55.084 92.221,55.695 92.221,61.065 92.37,61.214 v1(93.497,61.214)
D_N: J1.A7 J1.B7 R4.1 U1.2 U1.7 | length 9.9
  Top Layer w0.254: v1@88.256,63.465 88.324,63.465 88.62,63.17 89.354,63.17 J1.B7 89.389,63.181 89.934,63.181 89.949,63.195 U1.2 ; v1@88.29,62.052 88.359,62.052 88.465,62.158 J1.A7 ; J1.A7@89.369,62.155 90.118,62.155 90.278,61.995 U1.7 ; U1.2@90.928,63.193 R4.1@92.489,63.193
  Bottom Layer w0.254: v1(88.25,63.465) 88.201,63.417 87.916,63.417 87.728,63.229 87.728,62.218 87.877,62.069 88.274,62.069 v1@88.29,62.052
  other v1: 88.25,62.052
D_P: J1.A6 J1.B6 R2.1 U1.4 U1.8 | length 9.7
  Top Layer w0.254: v1@88.265,61.316 88.29,61.316 88.334,61.316 88.664,61.646 89.354,61.646 J1.B6 ; v1@88.292,62.769 88.328,62.769 88.439,62.658 J1.A6 90.174,62.658 90.311,62.795 U1.8 ; J1.B6@89.923,61.635 89.963,61.595 U1.4 ; U1.4@90.928,61.595 R2.1@92.513,61.595
  Bottom Layer w0.254: v1@88.29,61.316 88.723,61.316 88.927,61.52 88.927,62.615 88.773,62.769 v1@88.29,62.769
  other v1: 88.25,61.316 88.25,62.769
DTR: Q1.2 R15.2 U2.23 | length 2.3
  Top Layer w0.254: U2.23 95.948,61.802 95.955,61.809 95.955,62.662 ; R15.2 96.053,63.039 96.576,63.039 96.939,63.403 96.939,63.508 96.99,63.559 Q1.2
GND: B1.20 B2.20 C1.1 C2.1 C3.1 C4.1 C5.1 C6.1 D5.2 J1.1 J1.2 J1.3 J1.4 J1.A1-B12 J1.B1-A12 J2.6 J2.MP1 J2.MP2 P3.20 R1.2 R5.2 R6.2 R8.2 U1.3 U2.2 U2.25 U3.3 U3.5 U3.7 | length 8.2
  Top Layer w0.254: U3.3 85.976,55.535 U3.7@86.05,55.609 ; U3.7@86.05,55.913 U3.7 ; U3.7@86.589,56.185 U3.5 ; U1.3 91.46,62.395 91.467,62.402 92.112,62.402 v1(92.119,62.395) ; C1.1 93.15,58.085 93.15,58.459 v1(93.191,58.5) 93.189,58.502 93.189,59.406 v1(93.188,59.408) ; U2.2 95.396,60.597 96.146,59.847 U2.25 96.198,59.847 U2.25@96.132,59.781
  Layer 1 w0.254: P3.20@111.804,54.972 P3.20
  other v1: 86.05,55.7 86.5,55.7 86.05,56.2 86.5,56.2 86.05,56.7 86.5,56.7 97.635,56.716 96,59.3 96.5,59.3 97,59.3 97.5,59.3 96,59.8 102.591,59.874 96,60.3 96,60.8 105.34,63.145 99.439,64.131 92.446,64.402 90.907,65.786
GPIO0: C5.2 Q1.3 R12.1 R16.1 | length 3.5
  Top Layer w0.254: R16.1@97.809,65.557 97.809,64.764 98.014,64.559 98.366,64.559 C5.2@98.367,64.561 ; R16.1@97.873,65.621 R16.1 98.41,65.684 98.795,65.3 98.969,65.3 R12.1@99.092,65.176 ; Q1.3@98.355,64.065 Q1.3 98.367,64.065 C5.2@98.367,64.561 ; C5.2 C5.2@98.367,64.561
GPIO0_ESD: D5.6 J2.3 P5.20 R12.2 | length 16.5
  Top Layer w0.254: R12.2 99.867,64.573 101.641,62.799 D5.6 ; D5.6@101.651,61.844 101.651,61.239 101.991,60.899 103.363,60.899 104.113,60.149 105.278,60.149 105.295,60.166 107.417,60.166 108.909,61.658 P5.20
NetC1_2: C1.2 C2.2 FB1.2 R3.1 U2.5 U2.6 U2.7 U2.8 | length 5.3
  Top Layer w0.254: C1.2 94.108,57.152 FB1.2 ; C2.2@94.113,58.597 U2.6 94.748,58.597 ; C1.2@94.116,58.043 C2.2@94.116,58.595 ; U2.5 94.748,58.597 ; R3.1@95.765,56.947 R3.1 ; R3.1@95.839,56.952 95.948,57.06 U2.8 U2.7 95.445,57.9 95.17,57.9 94.748,58.322 94.748,58.597
NetD1_24: D1.24 R6.1 | length 1
  Top Layer w0.254: D1.24@83.205,56.526 83.205,55.658 R6.1@83.269,55.594
NetD2_24: D2.24 R8.1 | length 0.7
  Top Layer w0.254: D2.24@89.862,55.401 89.862,56.086 R8.1@89.865,56.089
NetD3_24: D3.24 R9.1 | length 4.9
  Top Layer w0.254: v1(104.949,57.318) 104.95,57.319 D3.24 D3.24
  Bottom Layer w0.254: v1(100.917,58.531) 103.736,58.531 v1(104.949,57.318)
NetD4_24: D4.24 R7.1 | length 8.5
  Top Layer w0.254: v1(104.984,63.973) 104.987,63.975 105.347,63.975 D4.24
  Bottom Layer w0.254: v1(100.937,59.214) 100.963,59.188 103.768,59.188 103.917,59.336 103.917,62.905 v1(104.984,63.973)
NetQ1_1: Q1.1 R14.1 | length 0.5
  Top Layer w0.254: R14.1 97.057,65.04 97.057,64.568 Q1.1
NetQ2_1: Q2.1 R15.1 | length 1.6
  Top Layer w0.254: R15.1 95.205,63.402 95.354,63.551 96.296,63.551 Q2.1
NetR3_2: R3.2 U2.9 | length 1
  Top Layer w0.254: U2.9 96.451,57.879 96.451,57.04 R3.2@96.539,56.952
RST: C6.2 Q2.3 R13.1 R17.1 | length 6.2
  Top Layer w0.254: Q2.3 95.015,64.065 95.015,64.485 95.021,64.491 95.406,64.491 95.555,64.639 95.555,65.551 95.561,65.557 95.561,66.044 95.71,66.192 98.71,66.192 98.943,65.96 98.969,65.96 99.066,65.863 R13.1@99.066,65.837
RST_ESD: D5.4 J2.4 P7.20 R13.2 | length 16.9
  Top Layer w0.254: R13.2 100.41,65.862 100.559,65.713 100.559,64.42 101.961,63.017 103.2,63.017 103.53,62.687 103.53,61.865 D5.4 103.541,61.604 103.979,61.166 105.331,61.166 J2.4 107.408,61.141 109.957,63.69 P7.20
RTS: Q2.2 R14.2 U2.19 | length 5.9
  Top Layer w0.254: R14.2 96.301,65.046 96.301,64.562 Q2.2 96.304,64.208 96.453,64.059 97.46,64.059 97.993,63.525 98.577,63.525 98.933,63.17 98.933,62.357 98.448,61.872 98.027,61.872 97.952,61.797 U2.19
RX_LED: R9.2 U2.13 | length 1.2
  Top Layer w0.254: U2.13 99.626,58.597 99.727,58.496 R9.2@99.777,58.496
RXD: R11.1 U2.20 | length 6
  Top Layer w0.254: U2.20 97.451,61.8 97.451,62.235 97.693,62.476 97.95,62.476 98.285,62.812 v1(98.354,62.812) ; v1(100.593,63.128) 100.601,63.12 100.601,61.14 R11.1
  Bottom Layer w0.254: v1(98.354,62.812) 98.423,62.812 98.74,63.128 v1(100.593,63.128)
RXD_ESD: D5.3 J2.2 P6.20 R11.2 | length 13
  Top Layer w0.254: R11.2 103.296,60.382 103.541,60.137 D5.3 103.541,59.339 103.714,59.166 J2.2@105.357,59.166 ; J2.2 107.408,59.141 107.893,59.627 P6.20
TX_LED: R7.2 U2.14 | length 1.2
  Top Layer w0.254: U2.14 98.651,59.1 99.721,59.1 R7.2@99.777,59.157
TXD: R10.1 U2.21 | length 5.3
  Top Layer w0.254: U2.21 96.948,62.509 97.212,62.774 v1(97.212,62.842) ; R10.1 v1(99.949,62.279)
  Bottom Layer w0.254: v1(97.212,62.842) 97.212,62.782 97.762,62.232 99.902,62.232 v1(99.949,62.279)
TXD_ESD: D5.1 J2.1 P4.20 R10.2 | length 14.5
  Top Layer w0.254: R10.2 99.949,59.915 100.098,59.766 101.468,59.766 101.641,59.593 101.641,58.557 101.858,58.339 105.122,58.339 105.295,58.166 107.421,58.166 107.992,57.595 P4.20
Vbus: F1.1 J1.A4-B9 J1.B4-A9 U1.1 U1.5 | length 8.1
  Top Layer w0.508: J1.B4-A9 89.412,60.054 90.401,60.054 90.453,60.105 90.735,60.105 v2(90.832,60.203) 90.92,60.115 90.92,59.525 91.291,59.154 F1.1@91.491,59.154 ; J1.A4-B9 v2@90.495,64.808
  Layer 2 w0.254: 90.602,61.468 90.603,61.469
  Layer 2 w0.508: v2@90.602,60.63 90.602,61.468 ; 90.603,61.469 v2(90.603,64.638)
Vselect: D5.5 J2.5 P8.20 S1.3 TB1.22 TB2.22 | length 34.3
  Top Layer w0.254: 96.268,55.772 96.287,55.752 96.473,55.752 ; v2(97.069,55.752) v2@97.075,55.759 ; 97.627,55.759 98.091,55.759 TB1.22 ; D5.5 D5.5@102.764,62.027
  Top Layer w0.508: 96.473,55.752 v2(97.069,55.752) ; v2@97.075,55.759 97.627,55.759
  Layer 2 w0.508: v2(93.384,64.272) 93.393,64.281 94.173,64.281 96.872,61.582 101.688,61.582 v1(102.489,62.382) 104.411,62.382 v1(104.425,62.368) ; v1@104.421,62.382 107.672,62.382 111.012,65.722 P8.20
  Bottom Layer w0.508: v2(93.384,64.272) 93.481,64.174 93.95,64.174 95.03,63.094 S1.3 95.03,57.791 v2(97.069,55.752)
Vusb: C3.2 D2.23 D6.19 F1.2 S1.1 TB1.21 U3.4 U3.6 | length 25.7
  Top Layer w0.254: U3.6 87.307,56.842 87.79,56.842 87.969,57.021 C3.2@88.019,57.021 ; F1.2@90.965,56.202 91.463,55.704 F1.2@91.491,55.704
  Top Layer w0.508: v2(87.99,55.639) 88.003,55.651 D6.19@88.003,56.285 ; D6.19 88.015,56.842 88.015,57.017 C3.2@88.019,57.021 ; v2@88.093,55.742 88.093,55.675 88.225,55.543 88.954,55.543 88.958,55.539 D2.23 ; v2(90.849,57.486) 91.441,56.893 91.441,55.854 F1.2 ; 98.897,55.77 99.748,55.77 100.254,56.276 v2(100.254,57.455)
  Layer 2 w0.508: v2(87.99,55.639) 88,55.629 89.514,55.629 90.862,56.977 90.862,57.472 v2(90.849,57.486) ; v2@90.862,57.388 90.959,57.486 90.975,57.47 100.238,57.47 v2(100.254,57.455)
  Bottom Layer w0.508: 99.03,58.7 S1.1 ; 99.067,58.641 v2(100.254,57.455)
pads on no net: J1. J1.A8 J1.B8 S1. U2.1 U2.10 U2.11 U2.12 U2.15 U2.16 U2.17 U2.18 U2.22 U2.24

## Polygon pours and split planes (outlines as drawn)
GND on Top Layer "GND_L01_P000" (solid, pour order 0): 81.737,53.848 81.737,67.488 112.268,67.488 112.243,67.462 112.243,53.848
GND on Top Layer "GND_L01_P001" (solid, pour order 1): 81.585,53.696 81.585,67.64 112.395,67.64 112.395,53.696
GND on Layer 1 "GND_L02_P004" (solid, pour order 4): 81.585,53.696 81.585,67.64 112.395,67.64 112.395,53.696
3.3V on Layer 2 "3.3V_L03_P003" (solid, pour order 3): 82.55,66.675 82.55,54.61 111.442,54.61 111.442,66.675
GND on Bottom Layer "GND_L04_P002" (solid, pour order 2): 81.585,53.696 112.395,53.696 112.395,67.64 81.585,67.64

## Other copper
Top Layer:
  text "1" at 83.2,65.4 h1.52 r270
Layer 1:
  text "2" at 83.2,65.6 h1.52 r270
Layer 2:
  text "3" at 83.2,65.6 h1.52 r270
Bottom Layer:
  text "4" at 83.2,63.301 h1.52 r270
  text "12/2022" at 84.6,60.641 h1.52 r270
  text "LMGC-CNRS-UM" at 105.818,55.34 h1.52 r270
  text "Sébastien DYCKE" at 107.317,55.34 h1.42 r270
  text "2517-V2.0.21.SD" at 108.719,55.34 h1.57 r270
  text "DYBoard-Feeder" at 110.216,55.34 h1.52 r270

## Silkscreen, mask and mechanical layers (free items; w line width, h text height)
Top Overlay:
  text "RX" at 106.016,65.338 h0.51 r90
  text "VOUT" at 108.677,65.271 h0.51
  text "RST" at 110.008,63.435 h0.51
  text "GPIO" at 109.607,61.403 h0.51
  text "RX" at 110.528,59.367 h0.51
  text "TX" at 110.528,57.331 h0.51
  text "GND" at 109.162,55.548 h0.51
  text "TX" at 105.994,55.201 h0.51 r90
Bottom Overlay:
  text "Pastilles" at 98.499,58.338 h0.51
  text "5V ou 3.3V" at 98.915,57.589 h0.51
  text "|" at 98.303,56.886 h0.51
  text "v    v" at 98.471,56.885 h0.51
  text "|" at 95.759,56.88 h0.51
  text "3V" at 95.746,55.204 h1
  text "5V" at 100.417,55.204 h1
  text "CC1" at 87.458,54.726 h0.51
  text "CC2" at 89.911,54.726 h0.51
  text "D+" at 91.348,54.726 h0.51
  text "D-" at 92.798,54.726 h0.51
Top Solder:
  region: 84.308,62.467 83.073,62.467 83.073,65.527 84.308,65.527
  region: 81.585,67.64 81.585,53.696 112.395,53.696 112.395,67.64 81.585,67.64 82.88,66.37 82.88,54.991 111.125,54.991 111.125,66.37 82.88,66.37
Bottom Solder:
  region: 93.593,54.991 94.888,53.696 112.395,53.696 111.099,54.991 93.595,54.991 93.594,54.99
  region: 85.977,54.992 84.681,53.695 84.681,53.694 81.587,53.694 81.585,53.696 81.585,67.64 112.395,67.64 111.125,66.37 82.88,66.37 82.88,54.991 85.977,54.991
  region: 84.328,65.527 84.328,62.465 83.063,62.465 83.063,65.527
Mechanical 1:
  lines w0.254: 81.712,53.571 81.712,67.763 112.52,67.763 112.52,53.571 81.712,53.571